# Altium PCB AX301_AX4010.PcbDoc (part 5 of 10)
Units mil, origin at the board's own origin, x right, y up, seen from the top; angles counter-clockwise.
Board outline 5185 x 3614 mil, 4 copper layers (Top Layer, GND, Mid-Layer 1, Bottom Layer); 191 components, 338 nets, 1108 pads, 420 vias.
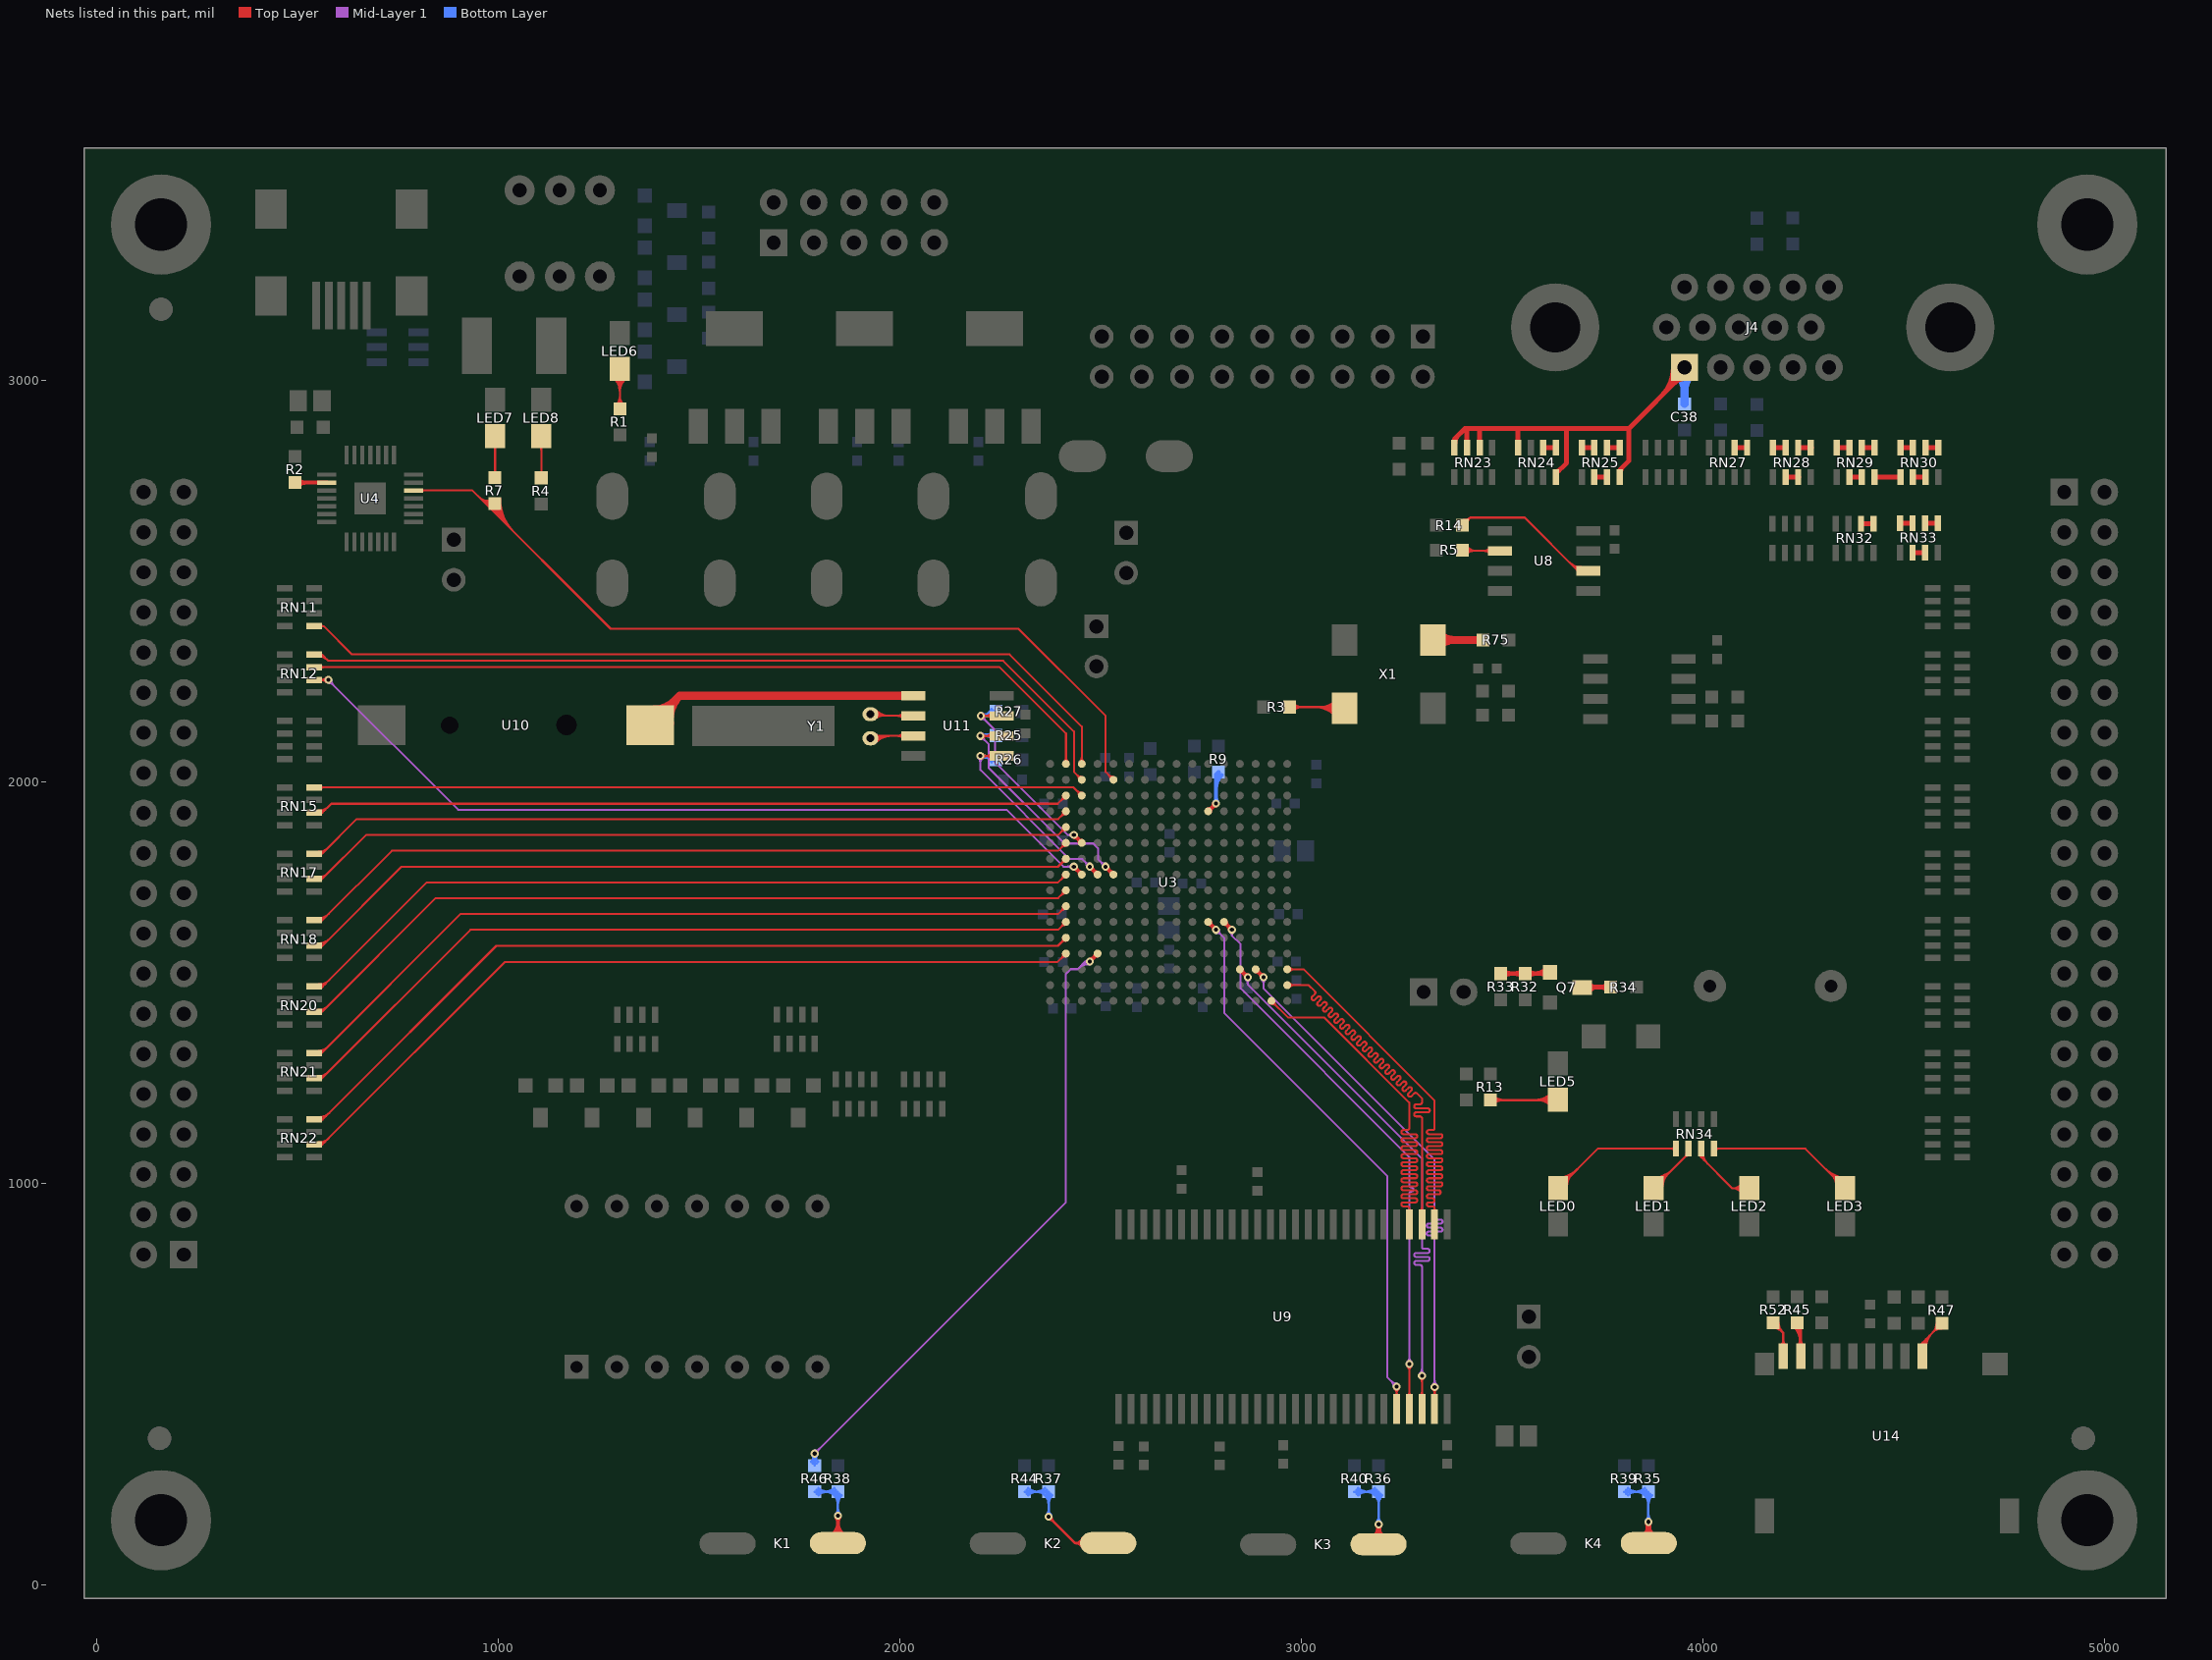
[diagram p7: the nets of this part, all layers, seen from the top]

## Via types
v1: diameter 20, hole 10, Top Layer to Bottom Layer, 377 vias
v2: diameter 30, hole 15, Top Layer to Bottom Layer, 41 vias
v3: diameter 40, hole 20, Top Layer to Bottom Layer, 2 vias

## Nets (pads, with @x,y where several pads share a name; then routed paths per layer and width w, separated by ;. In a path a pad name is that pad's centre, name@x,y a point inside that pad or via, vN(x,y) a via of type N, cw(c..) or ccw(c..) an arc to the next point about the centre after c; other vN are vias at no path point) (continued)
NetK1_1: K1.1 R38.2 R46.2 | length 730.9
  Top Layer w6: K1.1@1828.63,120.37 ccw(c1786.71,162.29) 1846,162.29 ccw(c1905.29,162.29) K1.1@1863.37,120.37 ; K1.1@1832.88,116.12 ccw(c1801.19,147.81) 1846,147.81 ccw(c1890.81,147.81) K1.1@1859.12,116.12 ; K1.1@1837.12,111.88 ccw(c1815.68,133.32) 1846,133.32 ccw(c1876.32,133.32) K1.1@1854.88,111.88 ; v1@1840.31,166.92 cw(c1822.65,154.26) 1844.09,150.72 ; v1@1841.05,166.05 cw(c1829.1,154.1) 1846,154.1 cw(c1862.9,154.1) v1@1850.95,166.05 ; v1@1841.92,165.31 cw(c1834.89,155.51) 1846.79,157.47 ; 1845.21,157.47 cw(c1857.11,155.51) v1@1850.08,165.31 ; K1.1@1846,103 v1(1846,171) ; 1847.91,150.72 cw(c1869.35,154.26) v1@1851.69,166.92
  Bottom Layer w6: R46.2@1788,231 R38.2@1846,231 v1(1846,171) ; R46.2@1792.95,226.05 cw(c1804.9,214.1) 1804.9,231 cw(c1804.9,247.9) R46.2@1792.95,235.95 ; R46.2@1797.19,221.81 cw(c1819.38,199.62) 1819.38,231 cw(c1819.38,262.38) R46.2@1797.19,240.19 ; R38.2@1836.81,240.19 cw(c1814.62,262.38) 1814.62,231 cw(c1814.62,199.62) 1836.81,221.81 cw(c1814.62,199.62) 1846,199.62 cw(c1877.38,199.62) R38.2@1855.19,221.81 ; v1@1841.05,175.95 ccw(c1829.1,187.9) 1846,187.9 ccw(c1862.9,187.9) v1@1850.95,175.95 ; R38.2@1841.05,235.95 cw(c1829.1,247.9) 1829.1,231 cw(c1829.1,214.1) 1841.05,226.05 cw(c1829.1,214.1) 1846,214.1 cw(c1862.9,214.1) R38.2@1850.95,226.05
NetK2_1: K2.1 R37.2 R44.2 | length 656.3
  Top Layer w6: v1@2371,162 cw(c2371,145.1) 2382.95,157.05 cw(c2394.9,169) v1@2378,169 ; v1(2371,169) 2437,103 ; K2.1@2454.96,91.94 ccw(c2437,82.88) 2437,103 ; K2.1@2454.96,114.06 cw(c2437,123.12) 2437,103 ; K2.1@2460.32,94.64 ccw(c2446.75,87.8) 2446.75,103 ccw(c2446.75,118.2) K2.1@2460.32,111.36 ; K2.1@2519.33,103 2437,103
  Bottom Layer w6: R44.2@2311,231 R37.2@2371,231 v1(2371,169) ; R44.2@2315.95,226.05 cw(c2327.9,214.1) 2327.9,231 cw(c2327.9,247.9) R44.2@2315.95,235.95 ; R44.2@2320.19,221.81 cw(c2342.38,199.62) 2342.38,231 cw(c2342.38,262.38) R44.2@2320.19,240.19 ; R37.2@2361.81,240.19 cw(c2339.62,262.38) 2339.62,231 cw(c2339.62,199.62) 2361.81,221.81 cw(c2339.62,199.62) 2371,199.62 cw(c2402.38,199.62) R37.2@2380.19,221.81 ; v1@2366.05,173.95 ccw(c2354.1,185.9) 2371,185.9 ccw(c2387.9,185.9) v1@2375.95,173.95 ; R37.2@2366.05,235.95 cw(c2354.1,247.9) 2354.1,231 cw(c2354.1,214.1) 2366.05,226.05 cw(c2354.1,214.1) 2371,214.1 cw(c2387.9,214.1) R37.2@2375.95,226.05
NetK3_2: K3.2 R36.2 R40.2 | length 648
  Top Layer w6: K3.2@3177.93,119.85 ccw(c3155.31,150) v1(3193,150) ; K3.2@3181.53,115.05 ccw(c3164.32,138) 3193,138 ; v1@3186.94,146.5 cw(c3172.3,138.05) 3188.63,133.67 cw(c3204.95,129.3) v1@3196.5,143.94 ; v1@3188.05,145.05 cw(c3176.1,133.1) 3193,133.1 cw(c3209.9,133.1) v1@3197.95,145.05 ; v1@3189.5,143.94 cw(c3181.05,129.3) 3197.37,133.68 cw(c3213.7,138.05) v1@3199.06,146.5 ; K3.2@3193,100.54 v1(3193,150) ; 3193,137.67 ccw(c3222.05,137.67) K3.2@3204.12,114.81 ; K3.2@3207.82,119.53 cw(c3231.73,150) v1(3193,150)
  Bottom Layer w6: R40.2@3132.33,230.33 R40.2@3133,231 R36.2@3193,231 v1(3193,150) ; R40.2@3137.95,226.05 cw(c3149.9,214.1) 3149.9,231 cw(c3149.9,247.9) R40.2@3137.95,235.95 ; R40.2@3142.19,221.81 cw(c3164.38,199.62) 3164.38,231 cw(c3164.38,262.38) R40.2@3142.19,240.19 ; R36.2@3183.81,240.19 cw(c3161.62,262.38) 3161.62,231 cw(c3161.62,199.62) 3183.81,221.81 cw(c3161.62,199.62) 3193,199.62 cw(c3224.38,199.62) R36.2@3202.19,221.81 ; v1@3188.05,154.95 ccw(c3176.1,166.9) 3193,166.9 ccw(c3209.9,166.9) v1@3197.95,154.95 ; R36.2@3188.05,235.95 cw(c3176.1,247.9) 3176.1,231 cw(c3176.1,214.1) 3188.05,226.05 cw(c3176.1,214.1) 3193,214.1 cw(c3209.9,214.1) R36.2@3197.95,226.05
NetK4_1: K4.1 R35.2 R39.2 | length 678.6
  Top Layer w6: K4.1@3849.55,121.23 ccw(c3818.17,156) v1(3865,156) ; K4.1@3853.57,116.78 ccw(c3830.35,142.5) 3865,142.5 ; v1@3858.94,152.5 cw(c3844.3,144.05) 3860.63,139.67 ; v1@3860.05,151.05 cw(c3848.1,139.1) 3865,139.1 cw(c3881.9,139.1) v1@3869.95,151.05 ; 3860.63,139.68 cw(c3876.95,135.3) v1@3868.5,149.94 ; v1@3861.5,149.94 cw(c3853.05,135.3) 3869.37,139.68 cw(c3885.7,144.05) v1@3871.06,152.5 ; K4.1@3865,104 v1(3865,156) ; 3865,131.11 ccw(c3888.37,131.11) K4.1@3873.82,112.83 ; 3865,143.56 ccw(c3898.27,143.56) K4.1@3877.55,117.52 ; K4.1@3881.29,122.22 cw(c3908.17,156) v1(3865,156)
  Bottom Layer w6: R39.2@3805,231 R35.2@3865,231 v1(3865,156) ; R39.2@3809.95,226.05 cw(c3821.9,214.1) 3821.9,231 cw(c3821.9,247.9) R39.2@3809.95,235.95 ; R39.2@3814.19,221.81 cw(c3836.38,199.62) 3836.38,231 cw(c3836.38,262.38) R39.2@3814.19,240.19 ; R35.2@3855.81,240.19 cw(c3833.62,262.38) 3833.62,231 cw(c3833.62,199.62) 3855.81,221.81 cw(c3833.62,199.62) 3865,199.62 cw(c3896.38,199.62) R35.2@3874.19,221.81 ; v1@3860.05,160.95 ccw(c3848.1,172.9) 3865,172.9 ccw(c3881.9,172.9) v1@3869.95,160.95 ; R35.2@3860.05,235.95 cw(c3848.1,247.9) 3848.1,231 cw(c3848.1,214.1) 3860.05,226.05 cw(c3848.1,214.1) 3865,214.1 cw(c3881.9,214.1) R35.2@3869.95,226.05
NetLED0_1: LED0.1 RN34.5 | length 578.7
  Top Layer w5: LED0.1@3640,987 3738.85,1085.85 RN34.5@3933.51,1085.85 RN34.5@3933.51,1070.51 ; LED0.1@3640,999.5 ccw(c3640,1029.68) LED0.1@3661.34,1008.34 ; LED0.1@3640,1004.5 ccw(c3640,1046.75) 3669.87,1016.87 ; LED0.1@3640,1009.5 ccw(c3640,1063.82) 3678.41,1025.41 ; LED0.1@3640,1014.5 ccw(c3640,1080.89) 3686.95,1033.95 ; LED0.1@3657.5,992 cw(c3687.68,992) 3666.34,1013.34 ; LED0.1@3662.5,992 cw(c3704.75,992) 3674.87,1021.87 ; RN34.5@3929.71,1082.05 ccw(c3920.54,1072.88) 3920.54,1085.85 ccw(c3920.54,1098.82) RN34.5@3929.71,1089.65
NetLED1_1: LED1.1 RN34.6 | length 363.7
  Top Layer w5: LED1.1@3878.33,987 3965.01,1073.67 RN34.6@3965.01,1085.85 ; LED1.1@3878.33,999.5 ccw(c3878.33,1029.68) LED1.1@3899.67,1008.34 ; LED1.1@3878.33,1004.5 ccw(c3878.33,1046.75) 3908.21,1016.87 ; LED1.1@3878.33,1009.5 ccw(c3878.33,1063.82) 3916.74,1025.41 ; LED1.1@3878.33,1014.5 ccw(c3878.33,1080.89) 3925.28,1033.95 ; LED1.1@3895.83,992 cw(c3926.01,992) 3904.67,1013.34 ; LED1.1@3900.83,992 cw(c3943.08,992) 3913.21,1021.87 ; 3955.58,1064.24 ccw(c3945.78,1074.04) RN34.6@3959.63,1074.04 ; 3956.46,1065.12 cw(c3965.01,1056.57) RN34.6@3965.01,1068.66
NetLED2_1: LED2.1 RN34.7 | length 355.3
  Top Layer w5: RN34.7@3991.88,1074.04 ccw(c4003.75,1074.04) 3995.35,1065.65 ; RN34.7@3993.72,1069.44 cw(c3990.72,1064.5) 3996.5,1064.5 ; RN34.7@3996.5,1085.85 3996.5,1064.5 ; RN34.7@3996.88,1074.04 ccw(c4020.82,1074.04) 4003.89,1057.11 ; RN34.7@3999.29,1069.44 ccw(c4002.29,1064.5) 3996.5,1064.5 ; RN34.7@4001.88,1074.04 ccw(c4037.89,1074.04) 4012.43,1048.57 ; LED2.1@4098.1,974.29 ccw(c4074,957.8) 4074,987 ; LED2.1@4098.1,999.71 cw(c4074,1016.2) 4074,987 ; LED2.1@4102.23,977.12 ccw(c4083.48,964.29) 4083.48,987 ccw(c4083.48,1009.71) LED2.1@4102.23,996.88 ; LED2.1@4129.33,987 LED2.1@4116.67,987 4074,987 ; 3996.5,1064.5 4074,987
NetLED3_1: LED3.1 RN34.8 | length 606.7
  Top Layer w5: RN34.8@4028,1076 RN34.8@4028,1085.85 4256.15,1085.85 LED3.1@4355,987 ; RN34.8@4031.8,1082.05 cw(c4040.97,1072.88) 4040.97,1085.85 cw(c4040.97,1098.82) RN34.8@4031.8,1089.65 ; 4308.05,1033.95 ccw(c4355,1080.89) LED3.1@4355,1014.5 ; 4316.59,1025.41 ccw(c4355,1063.82) LED3.1@4355,1009.5 ; 4320.13,1021.87 cw(c4290.25,992) LED3.1@4332.5,992 ; 4325.13,1016.87 ccw(c4355,1046.75) LED3.1@4355,1004.5 ; 4328.66,1013.34 cw(c4307.32,992) LED3.1@4337.5,992 ; LED3.1@4333.66,1008.34 ccw(c4355,1029.68) LED3.1@4355,999.5
NetLED5_2: LED5.2 R13.2 | length 408.6
  Top Layer w6: R13.2@3471,1207 LED5.2@3638,1207 ; R13.2@3475.95,1202.05 cw(c3487.9,1190.1) 3487.9,1207 cw(c3487.9,1223.9) R13.2@3475.95,1211.95 ; R13.2@3480.19,1197.81 cw(c3502.38,1175.62) 3502.38,1207 cw(c3502.38,1238.38) R13.2@3480.19,1216.19 ; 3583.47,1207 ccw(c3583.47,1263.53) LED5.2@3623.44,1223.56 ; 3588.3,1207 cw(c3588.3,1157.3) LED5.2@3623.44,1192.44 ; 3597.96,1207 ccw(c3597.96,1249.04) LED5.2@3627.69,1219.31 ; 3602.79,1207 cw(c3602.79,1171.79) LED5.2@3627.69,1196.69 ; 3612.44,1207 ccw(c3612.44,1234.56) LED5.2@3631.93,1215.07
NetLED6_1: LED6.1 R1.2 | length 381.5
  Top Layer w5: LED6.1@1287.09,3007.09 cw(c1248.68,2968.68) 1303,2968.68 cw(c1357.32,2968.68) LED6.1@1318.91,3007.09 ; LED6.1@1290.63,3010.63 cw(c1260.75,2980.75) 1303,2980.75 cw(c1345.25,2980.75) LED6.1@1315.37,3010.63 ; R1.2@1293.45,2938.55 ccw(c1270.41,2961.59) 1303,2961.59 ccw(c1335.59,2961.59) R1.2@1312.55,2938.55 ; LED6.1@1294.16,3014.16 cw(c1272.82,2992.82) 1303,2992.82 cw(c1333.18,2992.82) LED6.1@1311.84,3014.16 ; R1.2@1296.99,2935.01 ccw(c1282.48,2949.52) 1303,2949.52 ccw(c1323.52,2949.52) R1.2@1309.01,2935.01 ; R1.2@1303,2929 LED6.1@1303,3028
NetLED7_2: LED7.2 R7.2 | length 325.1
  Top Layer w5: LED7.2@976.09,2863.09 cw(c937.68,2824.68) 992,2824.68 cw(c1046.32,2824.68) LED7.2@1007.91,2863.09 ; LED7.2@979.63,2866.63 cw(c949.75,2836.75) 992,2836.75 cw(c1034.25,2836.75) LED7.2@1004.37,2866.63 ; LED7.2@983.16,2870.16 cw(c961.82,2848.82) 992,2848.82 cw(c1022.18,2848.82) LED7.2@1000.84,2870.16 ; R7.2@992,2758 LED7.2@992,2884
NetLED8_2: LED8.2 R4.2 | length 323.1
  Top Layer w5: LED8.2@1091.09,2860.09 cw(c1052.68,2821.68) 1107,2821.68 cw(c1161.32,2821.68) LED8.2@1122.91,2860.09 ; LED8.2@1094.63,2863.63 cw(c1064.75,2833.75) 1107,2833.75 cw(c1149.25,2833.75) LED8.2@1119.37,2863.63 ; LED8.2@1098.16,2867.16 cw(c1076.82,2845.82) 1107,2845.82 cw(c1137.18,2845.82) LED8.2@1115.84,2867.16 ; R4.2@1107,2757 LED8.2@1107,2881
NetQ7_1: Q7.1 R32.2 R33.2 | length 279.3
  Top Layer w12: R33.2@3497,1522 R32.2@3558,1522 Q7.1@3617,1522 ; R33.2@3504.07,1514.93 cw(c3521.14,1497.86) 3521.14,1522 cw(c3521.14,1546.14) R33.2@3504.07,1529.07 ; R32.2@3550.93,1514.93 ccw(c3533.86,1497.86) 3533.86,1522 ccw(c3533.86,1546.14) R32.2@3550.93,1529.07 ; R32.2@3565.07,1514.93 cw(c3582.14,1497.86) 3582.14,1522 cw(c3582.14,1546.14) R32.2@3565.07,1529.07 ; 3583.79,1522 ccw(c3583.79,1561.21) Q7.1@3611.51,1533.49 ; 3598.27,1522 cw(c3598.27,1503.27) Q7.1@3611.51,1516.51
NetQ7_3: Q7.3 R34.1 | length 153.4
  Top Layer w12: Q7.3@3701,1488 R34.1@3771,1488 ; Q7.3@3715.49,1478.51 cw(c3738.38,1455.62) 3738.38,1488 ; Q7.3@3715.49,1495.49 ccw(c3733.56,1513.56) 3733.56,1488 ; R34.1@3763.93,1480.93 ccw(c3746.86,1463.86) 3746.86,1488 ccw(c3746.86,1512.14) R34.1@3763.93,1495.07
NetR2_1: R2.1 U4.9 | length 120.3
  Top Layer w10: R2.1@494.1,2745.1 U4.9@572.68,2745.1 ; R2.1@501.78,2737.22 cw(c520.8,2718.2) 520.8,2745.1 ; R2.1@501.78,2752.78 ccw(c520.31,2771.31) 520.31,2745.1
NetR3_2: R3.2 X1.3 | length 525
  Top Layer w5: R3.2@2971,2186 X1.3@3100,2186 ; R3.2@2977.01,2179.99 cw(c2991.52,2165.48) 2991.52,2186 cw(c2991.52,2206.52) R3.2@2977.01,2192.01 ; R3.2@2980.55,2176.45 cw(c3003.59,2153.41) 3003.59,2186 cw(c3003.59,2218.59) R3.2@2980.55,2195.55 ; 3030.75,2186 cw(c3030.75,2105.75) X1.3@3087.5,2162.5 ; 3042.83,2186 cw(c3042.83,2117.83) X1.3@3091.03,2166.03 ; 3045.24,2186 ccw(c3045.24,2245.76) X1.3@3087.5,2203.5 ; 3054.9,2186 cw(c3054.9,2129.9) X1.3@3094.57,2169.57 ; 3057.31,2186 ccw(c3057.31,2233.69) X1.3@3091.03,2199.97 ; 3066.97,2186 cw(c3066.97,2141.97) X1.3@3098.1,2173.1 ; 3069.38,2186 ccw(c3069.38,2221.62) X1.3@3094.57,2196.43 ; X1.3@3103,2183 X1.3@3108,2183
NetR5_2: R5.2 U8.2 | length 199.7
  Top Layer w5: R5.2@3404,2575 U8.2@3495,2575 ; R5.2@3408.01,2583.01 ccw(c3427.35,2602.35) 3427.35,2575 ; R5.2@3411.55,2567.45 cw(c3429.76,2549.24) 3429.76,2575 ; R5.2@3411.55,2586.55 ccw(c3439.42,2614.42) 3439.42,2575 ; U8.2@3470.28,2568.28 ccw(c3454.06,2552.07) 3454.06,2575 ccw(c3454.06,2597.93) U8.2@3470.28,2581.72
NetR14_2: R14.2 U8.6 | length 494.5
  Top Layer w5: R14.2@3402,2639 3421,2658 ; R14.2@3403.23,2647.41 ccw(c3405.06,2659.86) 3413.96,2650.96 ccw(c3422.86,2642.06) R14.2@3410.41,2640.23 ; R14.2@3403.96,2652.36 ccw(c3406.87,2672.13) 3421,2658 ; R14.2@3415.36,2640.96 cw(c3435.13,2643.87) 3421,2658 ; 3668.83,2546.17 ccw(c3697,2574.33) U8.6@3697,2534.5 ; 3677.37,2537.63 ccw(c3697,2557.26) U8.6@3697,2529.5 ; U8.6@3685.73,2529.27 cw(c3681.46,2525) U8.6@3687.5,2525 ; U8.6@3715,2525 3690,2525 3557,2658 3421,2658
NetR45_2: R45.2 U14.8 | length 259.4
  Top Layer w6: R45.2@4226.81,642.81 cw(c4184.26,600.26) U14.8@4244.43,600.26 ; R45.2@4231.05,647.05 cw(c4198.74,614.74) 4244.43,614.74 ; R45.2@4235.29,651.29 cw(c4213.23,629.23) 4244.43,629.23 ; R45.2@4236,652 4244.43,643.57 U14.8@4244.43,568.82 ; U14.8@4237.58,594.04 ccw(c4219.13,608.94) 4242.58,612.5 ; U14.8@4238.2,594.73 ccw(c4223.16,609.78) 4244.43,609.78 ccw(c4265.7,609.78) U14.8@4250.66,594.73 ; 4243.62,605.59 ccw(c4258.7,607.88) U14.8@4249.66,595.6
NetR47_2: R47.2 U14.1 | length 320.2
  Top Layer w5: U14.1@4541.89,588.5 cw(c4562.15,588.5) 4547.83,602.83 ; U14.1@4543.94,597.07 ccw(c4541.59,602.58) 4547.58,602.58 ; U14.1@4546.89,588.5 cw(c4579.22,588.5) 4556.36,611.36 ; U14.1@4547.58,568.82 4547.58,602.58 ; U14.1@4551.23,597.07 cw(c4553.57,602.58) 4547.58,602.58 ; U14.1@4551.89,588.5 cw(c4596.29,588.5) 4564.9,619.9 ; U14.1@4556.89,588.5 cw(c4613.36,588.5) 4573.43,628.43 ; R47.2@4582.5,651 cw(c4549.91,651) 4572.95,627.95 cw(c4596,604.91) R47.2@4596,637.5 ; R47.2@4587.5,651 cw(c4566.98,651) 4581.49,636.49 cw(c4596,621.98) R47.2@4596,642.5 ; R47.2@4596,651 4547.58,602.58
NetR52_2: R52.2 U14.9 | length 202.8
  Top Layer w6: R52.2@4176,639 cw(c4176,607.62) 4198.19,629.81 cw(c4220.38,652) R52.2@4189,652 ; R52.2@4176,645 cw(c4176,628.1) 4187.95,640.05 cw(c4199.9,652) R52.2@4183,652 ; R52.2@4176,652 4201.13,626.87 U14.9@4201.13,568.82 ; U14.9@4194.9,594.73 ccw(c4179.85,609.78) 4201.13,609.78 ccw(c4222.4,609.78) U14.9@4207.36,594.73
NetR75_1: R75.1 X1.1 | length 191.5
  Top Layer w20: X1.1@3328,2353 R75.1@3438,2353 ; X1.1@3343.2,2337.8 cw(c3379.9,2301.1) 3379.9,2353 cw(c3379.9,2404.9) X1.1@3343.2,2368.2
NetRN24_1: RN24.1 RN24.2 | length 31.5
  Top Layer w12: RN24.2@3603.22,2832 RN24.1@3634.71,2832
NetRN25_1: RN25.1 RN25.2 | length 31.5
  Top Layer w12: RN25.2@3761.93,2832 RN25.1@3793.43,2832
NetRN25_3: RN25.3 RN25.4 | length 31.5
  Top Layer w12: RN25.4@3698.94,2832 RN25.3@3730.44,2832
NetRN25_6: RN25.6 RN25.7 | length 31.5
  Top Layer w12: RN25.6@3730.44,2758.85 RN25.7@3761.93,2758.85
NetRN27_1: RN27.1 RN27.2 | length 31.5
  Top Layer w12: RN27.2@4079.36,2832 RN27.1@4110.86,2832
NetRN28_1: RN28.1 RN28.2 | length 31.5
  Top Layer w12: RN28.2@4239.5,2832 RN28.1@4271,2832
NetRN28_3: RN28.3 RN28.4 | length 31.5
  Top Layer w12: RN28.4@4176.51,2832 RN28.3@4208.01,2832
NetRN28_6: RN28.6 RN28.7 | length 31.5
  Top Layer w12: RN28.6@4208.01,2758.85 RN28.7@4239.5,2758.85
NetRN29_1: RN29.1 RN29.2 | length 31.5
  Top Layer w12: RN29.2@4396.5,2832 RN29.1@4428,2832
NetRN29_3: RN29.3 RN29.4 | length 31.5
  Top Layer w12: RN29.4@4333.51,2832 RN29.3@4365.01,2832
NetRN29_6: RN29.6 RN29.7 | length 31.5
  Top Layer w12: RN29.6@4365.01,2758.85 RN29.7@4396.5,2758.85
NetRN29_8: RN29.8 RN30.5 | length 64.5
  Top Layer w12: RN29.8@4428,2758.85 RN30.5@4492.51,2758.85
NetRN30_1: RN30.1 RN30.2 | length 31.5
  Top Layer w12: RN30.2@4555.5,2832 RN30.1@4587,2832
NetRN30_3: RN30.3 RN30.4 | length 31.5
  Top Layer w12: RN30.4@4492.51,2832 RN30.3@4524.01,2832
NetRN30_6: RN30.6 RN30.7 | length 31.5
  Top Layer w12: RN30.6@4524.01,2758.85 RN30.7@4555.5,2758.85
NetRN32_1: RN32.1 RN32.2 | length 31.5
  Top Layer w12: RN32.2@4394.5,2643 RN32.1@4426,2643
NetRN33_1: RN33.1 RN33.2 | length 31.5
  Top Layer w12: RN33.2@4554.5,2644 RN33.1@4586,2644
NetRN33_3: RN33.3 RN33.4 | length 31.5
  Top Layer w12: RN33.4@4491.51,2644 RN33.3@4523.01,2644
NetRN33_6: RN33.6 RN33.7 | length 31.5
  Top Layer w12: RN33.6@4523.01,2570.85 RN33.7@4554.5,2570.85
NetU10_1: U10.1 U11.1 | length 862
  Top Layer w20: U10.1@1378.63,2141 1451.63,2214 ; U10.1@1388.47,2180.21 ccw(c1388.47,2251.12) 1438.61,2200.98 ; U10.1@1407.57,2143.09 cw(c1458.04,2148.61) U10.1@1422.14,2184.51 ; U10.1@1427.45,2145.26 cw(c1511.2,2154.43) 1451.63,2214 ; U11.1@2034,2214 1451.63,2214
NetU11_2: U11.2 Y1.1 | length 245.8
  Top Layer w5: Y1.1@1931,2164 U11.2@2034,2164 ; Y1.1@1933.04,2171.54 ccw(c1951.23,2189.73) 1951.23,2164 ; Y1.1@1936.57,2175.07 ccw(c1963.3,2201.8) 1963.3,2164 ; Y1.1@1940.11,2157.39 cw(c1956.06,2141.44) 1956.06,2164 ; Y1.1@1940.11,2178.61 ccw(c1975.37,2213.87) 1975.37,2164 ; U11.2@2009.28,2157.28 ccw(c1993.07,2141.07) 1993.07,2164 ccw(c1993.07,2186.93) U11.2@2009.28,2170.72
NetU11_3: U11.3 Y1.2 | length 254.5
  Top Layer w5: Y1.2@1933,2114 U11.3@2034,2114 ; Y1.2@1933.04,2104.46 cw(c1956.06,2081.44) 1956.06,2114 ; Y1.2@1936.57,2100.93 cw(c1968.13,2069.37) 1968.13,2114 ; Y1.2@1940.11,2097.39 cw(c1980.2,2057.3) 1980.2,2114 ; Y1.2@1940.11,2118.61 ccw(c1951.23,2129.73) 1951.23,2114 ; U11.3@2009.28,2107.28 ccw(c1993.07,2091.07) 1993.07,2114 ccw(c1993.07,2136.93) U11.3@2009.28,2120.72
NSTATUS: R9.2 U3.F4 | length 219
  Top Layer w10: U3.F4@2768.43,1926.17 v1(2788.11,1945.85) ; U3.F4@2768.43,1931.01 ccw(c2768.43,1942.7) 2776.69,1934.43 ccw(c2784.96,1926.17) U3.F4@2773.27,1926.17 ; v1@2783.11,1945.85 cw(c2771.04,1945.85) 2779.58,1937.32 cw(c2788.11,1928.78) v1@2788.11,1940.85
  Bottom Layer w10: v1@2784.58,1949.39 ccw(c2776.04,1957.92) 2788.11,1957.92 ccw(c2800.18,1957.92) v1@2791.65,1949.39 ; v1(2788.11,1945.85) 2788.11,2018.11 R9.2@2794,2024 ; 2788.11,1983.23 cw(c2834.77,1983.23) R9.2@2801.78,2016.22 ; 2788.11,2007.37 cw(c2810.63,2007.37) R9.2@2794.71,2023.29
P1: RN11.5 U3.P1 | length 2155.1
  Top Layer w5: RN11.5@541.15,2387.51 565,2387.51 ; RN11.5@556.96,2383.92 cw(c565,2376.71) 565,2387.51 ; RN11.5@556.96,2391.1 ccw(c565,2398.31) 565,2387.51 ; U3.P1@2448.27,2049.47 ccw(c2435.74,2062) 2453.46,2062 ccw(c2471.19,2062) U3.P1@2458.66,2049.47 ; U3.P1@2453.46,2044.28 2453.46,2137.54 2274,2317 635.51,2317 565,2387.51
P2: RN12.8 U3.P2 | length 2177.4
  Top Layer w5: RN12.8@541.15,2316.62 561,2316.62 ; RN12.8@552.96,2311.25 cw(c552.96,2278.87) 575.86,2301.77 ; RN12.8@552.96,2316.25 cw(c552.96,2295.94) 567.32,2310.3 ; RN12.8@557.93,2314.57 cw(c561,2313.3) 561,2316.62 ; RN12.8@557.93,2318.68 ccw(c561,2319.95) 561,2316.62 ; U3.P2@2446.12,2004.91 ccw(c2428.4,2004.91) 2440.93,2017.44 ccw(c2453.46,2029.97) U3.P2@2453.46,2012.25 ; U3.P2@2453.46,2004.91 2434,2024.37 2434,2125 2258,2301 576.62,2301 561,2316.62
P3: RN15.8 U3.P3 | length 1969
  Top Layer w5: RN15.8@541.15,1985.88 2433.12,1985.88 U3.P3@2453.46,1965.54 ; RN15.8@556.76,1982.08 cw(c565.93,1972.9) 565.93,1985.88 cw(c565.93,1998.85) RN15.8@556.76,1989.67 ; U3.P3@2446.12,1965.54 ccw(c2428.4,1965.54) 2440.93,1978.07 ccw(c2453.46,1990.6) U3.P3@2453.46,1972.88
P8: RN12.6 U3.P8 | length 2256.2
  Top Layer w5: RN12.6@541.15,2253.63 v1(576.63,2253.63) ; RN12.6@556.76,2249.83 cw(c565.93,2240.66) 565.93,2253.63 cw(c565.93,2266.61) RN12.6@556.76,2257.43 ; v1@571.33,2248.33 ccw(c558.53,2235.53) 558.53,2253.63 ccw(c558.53,2271.74) v1@571.33,2258.94
  Top Layer w10: v1@2433.78,1783.37 cw(c2433.78,1771.3) 2442.31,1779.84 cw(c2450.85,1788.37) v1@2438.78,1788.37 ; v1(2433.78,1788.37) U3.P8@2453.46,1768.68 ; U3.P8@2448.62,1768.68 ccw(c2436.93,1768.68) 2445.2,1776.95 ccw(c2453.46,1785.22) U3.P8@2453.46,1773.53
  Mid-Layer 1 w5: v1@576.63,2246.13 cw(c576.63,2228.03) 589.44,2240.83 cw(c602.24,2253.63) v1@584.13,2253.63 ; v1(576.63,2253.63) 900.27,1930 2266,1930 2407.63,1788.37 v1(2433.78,1788.37) ; v1@2428.48,1783.07 ccw(c2415.67,1770.26) 2415.67,1788.37 ccw(c2415.67,1806.48) v1@2428.48,1793.67
R1: RN12.7 U3.R1 | length 2065.2
  Top Layer w5: RN12.7@541.15,2285.13 2248.87,2285.13 2414.09,2119.91 U3.R1@2414.09,2044.28 ; RN12.7@556.76,2281.33 cw(c565.93,2272.15) 565.93,2285.13 cw(c565.93,2298.1) RN12.7@556.76,2288.93 ; U3.R1@2408.9,2049.47 ccw(c2396.37,2062) 2414.09,2062 ccw(c2431.82,2062) U3.R1@2419.29,2049.47
R3: RN15.6 U3.R3 | length 1974.2
  Top Layer w5: RN15.6@541.15,1922.88 562,1922.88 ; RN15.6@552.96,1923.26 ccw(c552.96,1945.98) 569.03,1929.91 ; RN15.6@552.96,1928.26 ccw(c552.96,1963.05) 577.57,1938.45 ; RN15.6@557.68,1920.32 cw(c562,1917.97) 562,1922.88 ; RN15.6@557.68,1925.45 ccw(c562,1927.8) 562,1922.88 ; U3.R3@2406.75,1965.54 cw(c2389.03,1965.54) 2401.56,1953 cw(c2414.09,1940.47) U3.R3@2414.09,1958.19 ; U3.R3@2414.09,1965.54 2393.56,1945 584.12,1945 562,1922.88
R4: RN17.8 U3.R4 | length 1993.8
  Top Layer w5: RN17.8@541.15,1820.5 561,1820.5 ; RN17.8@552.96,1820.87 ccw(c552.96,1841.18) 567.32,1826.82 ; RN17.8@552.96,1825.87 ccw(c552.96,1858.26) 575.86,1835.36 ; RN17.8@557.93,1818.45 cw(c561,1817.17) 561,1820.5 ; RN17.8@557.93,1822.55 ccw(c561,1823.83) 561,1820.5 ; U3.R4@2406.75,1926.17 cw(c2389.03,1926.17) 2401.56,1913.63 cw(c2414.09,1901.1) U3.R4@2414.09,1918.82 ; U3.R4@2414.09,1926.17 2394.93,1907 647.5,1907 561,1820.5
R5: RN17.6 U3.R5 | length 2003.6
  Top Layer w5: RN17.6@541.15,1757.51 561,1757.51 ; RN17.6@552.96,1757.88 ccw(c552.96,1778.19) 567.32,1763.83 ; RN17.6@552.96,1762.88 ccw(c552.96,1795.26) 575.86,1772.37 ; RN17.6@557.93,1755.45 cw(c561,1754.18) 561,1757.51 ; RN17.6@557.93,1759.56 ccw(c561,1760.83) 561,1757.51 ; U3.R5@2406.75,1886.8 cw(c2389.03,1886.8) 2401.56,1874.26 cw(c2414.09,1861.73) U3.R5@2414.09,1879.45 ; U3.R5@2414.09,1886.8 2394.3,1867 670.49,1867 561,1757.51
R6: RN18.8 U3.R6 | length 2036.2
  Top Layer w5: RN18.8@541.15,1655.12 562,1655.12 ; RN18.8@552.96,1655.5 ccw(c552.96,1678.22) 569.03,1662.15 ; RN18.8@552.96,1660.5 ccw(c552.96,1695.3) 577.57,1670.69 ; RN18.8@557.68,1652.56 cw(c562,1650.21) 562,1655.12 ; RN18.8@557.68,1657.69 ccw(c562,1660.04) 562,1655.12 ; U3.R6@2406.75,1847.43 cw(c2389.03,1847.43) 2401.56,1834.89 cw(c2414.09,1822.36) U3.R6@2414.09,1840.08 ; U3.R6@2414.09,1847.43 2394.67,1828 734.88,1828 562,1655.12
R7: RN18.6 U3.R7 | length 2062.6
  Top Layer w5: RN18.6@541.15,1592.13 563,1592.13 ; RN18.6@552.96,1587.51 ccw(c552.96,1600.57) 562.2,1591.33 ; RN18.6@552.96,1592.51 ccw(c552.96,1617.65) 570.74,1599.87 ; RN18.6@552.96,1597.51 ccw(c552.96,1634.72) 579.27,1608.41 ; RN18.6@557.43,1589.15 cw(c563,1585.44) 563,1592.13 ; RN18.6@557.43,1595.11 ccw(c563,1598.82) 563,1592.13 ; U3.R7@2406.75,1808.06 cw(c2389.03,1808.06) 2401.56,1795.52 cw(c2414.09,1782.99) U3.R7@2414.09,1800.71 ; U3.R7@2414.09,1808.06 2394.04,1788 758.87,1788 563,1592.13
R8: RN20.8 U3.R8 | length 2088.7
  Top Layer w5: RN20.8@541.15,1489.75 563,1489.75 ; RN20.8@552.96,1485.12 ccw(c552.96,1498.19) 562.2,1488.95 ; RN20.8@552.96,1490.12 ccw(c552.96,1515.26) 570.74,1497.49 ; RN20.8@552.96,1495.12 ccw(c552.96,1532.33) 579.27,1506.02 ; RN20.8@557.43,1486.77 cw(c563,1483.06) 563,1489.75 ; RN20.8@557.43,1492.73 ccw(c563,1496.44) 563,1489.75 ; U3.R8@2406.75,1768.68 cw(c2389.03,1768.68) 2401.56,1756.15 cw(c2414.09,1743.62) U3.R8@2414.09,1761.34 ; U3.R8@2414.09,1768.68 2394.41,1749 822.25,1749 563,1489.75
R9: RN20.6 U3.R9 | length 2075.3
  Top Layer w5: RN20.6@541.15,1426.76 561,1426.76 ; RN20.6@552.96,1427.13 ccw(c552.96,1447.44) 567.32,1433.08 ; RN20.6@552.96,1432.13 ccw(c552.96,1464.51) 575.86,1441.62 ; RN20.6@557.93,1424.7 cw(c561,1423.43) 561,1426.76 ; RN20.6@557.93,1428.81 ccw(c561,1430.08) 561,1426.76 ; U3.R9@2406.75,1729.32 cw(c2389.03,1729.32) 2401.56,1716.78 cw(c2414.09,1704.25) U3.R9@2414.09,1721.97 ; U3.R9@2414.09,1729.32 2394.78,1710 844.24,1710 561,1426.76
R10: RN21.8 U3.R10 | length 2089.8
  Top Layer w5: RN21.8@541.15,1324.38 560,1324.38 905.62,1670 2394.15,1670 U3.R10@2414.09,1689.94 ; RN21.8@552.96,1324.75 ccw(c552.96,1342.65) 565.62,1329.99 ; RN21.8@552.96,1329.75 ccw(c552.96,1359.72) 574.15,1338.53 ; U3.R10@2406.75,1689.94 cw(c2389.03,1689.94) 2401.56,1677.41 cw(c2414.09,1664.88) U3.R10@2414.09,1682.6
R11: RN21.6 U3.R11 | length 2111.2
  Top Layer w5: RN21.6@541.15,1261.38 561,1261.38 ; RN21.6@552.96,1261.76 ccw(c552.96,1282.07) 567.32,1267.71 ; RN21.6@552.96,1266.76 ccw(c552.96,1299.14) 575.86,1276.24 ; RN21.6@557.93,1259.33 cw(c561,1258.06) 561,1261.38 ; RN21.6@557.93,1263.44 ccw(c561,1264.71) 561,1261.38 ; U3.R11@2406.75,1650.57 cw(c2389.03,1650.57) 2401.56,1638.04 cw(c2414.09,1625.51) U3.R11@2414.09,1643.23 ; U3.R11@2414.09,1650.57 2394.52,1631 930.62,1631 561,1261.38
R12: RN22.8 U3.R12 | length 2160.5
  Top Layer w5: RN22.8@541.15,1159 563,1159 ; RN22.8@552.96,1154.37 ccw(c552.96,1167.44) 562.2,1158.2 ; RN22.8@552.96,1159.37 ccw(c552.96,1184.51) 570.74,1166.74 ; RN22.8@552.96,1164.37 ccw(c552.96,1201.58) 579.27,1175.27 ; RN22.8@557.43,1156.02 cw(c563,1152.31) 563,1159 ; RN22.8@557.43,1161.98 ccw(c563,1165.69) 563,1159 ; U3.R12@2406.75,1611.2 cw(c2389.03,1611.2) 2401.56,1598.67 cw(c2414.09,1586.14) U3.R12@2414.09,1603.86 ; U3.R12@2414.09,1611.2 2393.89,1591 995,1591 563,1159
R13: RN22.6 U3.R13 | length 2153.6
  Top Layer w5: RN22.6@541.15,1096.01 562,1096.01 ; RN22.6@552.96,1096.38 ccw(c552.96,1119.11) 569.03,1103.04 ; RN22.6@552.96,1101.38 ccw(c552.96,1136.18) 577.57,1111.57 ; RN22.6@557.68,1093.44 cw(c562,1091.09) 562,1096.01 ; RN22.6@557.68,1098.57 ccw(c562,1100.92) 562,1096.01 ; U3.R13@2406.75,1571.83 cw(c2389.03,1571.83) 2401.56,1559.3 cw(c2414.09,1546.77) U3.R13@2414.09,1564.49 ; U3.R13@2414.09,1571.83 2393.26,1551 1016.99,1551 562,1096.01
RED: C38.1 J4.1 RN23.2 RN23.3 RN23.4 RN24.4 RN24.8 RN25.8 | length 1503.2
  Top Layer w12: RN23.4@3381.51,2832 3381.51,2853.51 3408,2880 3661,2880 ; RN23.4@3383.39,2843.81 cw(c3411.33,2843.81) 3391.57,2863.57 ; RN23.3@3413.01,2832 3413.01,2878.01 ; RN23.2@3444.5,2832 3444.5,2879.5 ; RN24.4@3540.23,2832 3540.23,2879.23 ; RN24.8@3634.71,2758.85 3634.71,2767.71 3661,2794 3661,2880 ; RN24.8@3634.71,2772.54 ccw(c3634.71,2784.17) 3642.94,2775.94 ; RN25.8@3793.43,2758.85 3793.43,2776.43 3816.5,2799.5 3816.5,2880 ; RN25.8@3795.3,2770.66 cw(c3813.75,2770.66) 3800.71,2783.71 ; 3897.66,2961.16 ccw(c3826.81,3032) J4.1@3927,3032 ; 3918.14,2981.64 ccw(c3867.78,3032) J4.1@3939,3032 ; 3930.25,2993.75 cw(c3955,2968.99) J4.1@3955,3004 ; J4.1@3938.63,3002.13 ccw(c3908.75,3032) J4.1@3951,3032 ; J4.1@3955,3032 3955,3018.5 3816.5,2880 ; 3661,2880 3739.5,2880 3816.5,2880
  Bottom Layer w20: J4.1@3938.03,3015.03 cw(c3897.06,2974.06) 3955,2974.06 cw(c4012.94,2974.06) J4.1@3971.97,3015.03 ; C38.1@3955,2941 J4.1@3955,3032
RESET: R46.1 U3.N13 | length 1872.1
  Top Layer w10: v1(2473.15,1552.15) U3.N13@2492.83,1571.83 ; v1@2473.15,1557.15 ccw(c2473.15,1569.22) 2481.68,1560.68 ccw(c2490.22,1552.15) v1@2478.15,1552.15 ; U3.N13@2487.99,1571.83 cw(c2476.3,1571.83) 2484.57,1563.57 cw(c2492.83,1555.3) U3.N13@2492.83,1566.99
  Mid-Layer 1 w5: v1(1788,326) 2413,951 2413,1520 2426,1533 2443,1533 ; v1@1788,333.5 ccw(c1788,351.61) 1800.8,338.8 ccw(c1813.61,326) v1@1795.5,326 ; 2451.07,1541.07 cw(c2471.85,1520.29) v1@2473.05,1549.65 ; 2459.13,1549.13 cw(c2472.48,1535.79) v1@2473.25,1554.65 ; v1@2466.17,1549.41 ccw(c2462.15,1547.83) 2462.15,1552.15 ; v1@2466.17,1554.89 cw(c2462.15,1556.46) 2462.15,1552.15 ; v1@2472.84,1544.65 ccw(c2471.22,1504.79) 2443,1533 ; v1(2473.15,1552.15) 2462.15,1552.15 ; 2443,1533 2462.15,1552.15
  Bottom Layer w6: R46.1@1779.11,305.49 ccw(c1759.89,326) v1(1788,326) ; v1@1782.36,321.85 cw(c1773,314.95) 1784.23,311.94 cw(c1795.47,308.93) v1@1790.81,319.59 ; v1@1783.05,321.05 cw(c1771.1,309.1) 1788,309.1 cw(c1804.9,309.1) v1@1792.95,321.05 ; R46.1@1783.21,301.11 ccw(c1772.86,312.15) 1788,312.15 ccw(c1803.14,312.15) R46.1@1792.79,301.11 ; v1@1785.19,319.59 cw(c1780.53,308.93) 1791.77,311.94 cw(c1803,314.95) v1@1793.64,321.85 ; R46.1@1788,296 v1(1788,326) ; R46.1@1796.89,305.49 cw(c1816.11,326) v1(1788,326)
RTC_DATA: R25.2 U3.M8 U11.6 | length 894.1
  Top Layer w5: v1@2200,2113 v1(2201,2114) U11.6@2254,2114 ; v1@2206.3,2108.7 cw(c2219.11,2095.89) 2219.11,2114 cw(c2219.11,2132.11) v1@2206.3,2119.3 ; U11.6@2229.28,2107.28 ccw(c2213.07,2091.07) 2213.07,2114 ccw(c2213.07,2136.93) U11.6@2229.28,2120.72
  Top Layer w10: v1@2512.52,1783.37 cw(c2512.52,1771.3) 2521.05,1779.84 cw(c2529.59,1788.37) v1@2517.52,1788.37 ; v1(2512.52,1788.37) U3.M8@2532.2,1768.68 ; U3.M8@2527.36,1768.68 ccw(c2515.67,1768.68) 2523.94,1776.95 ccw(c2532.2,1785.22) U3.M8@2532.2,1773.53
  Mid-Layer 1 w5: v1@2201,2106.5 cw(c2201,2088.39) 2213.8,2101.2 cw(c2226.61,2114) v1@2208.5,2114 ; v1(2201,2114) 2221,2094 2221,2035 2410,1846 2482,1846 2494,1834 2494,1806.89 v1(2512.52,1788.37) ; v1@2505.02,1788.37 ccw(c2486.91,1788.37) 2499.72,1801.17 ccw(c2512.52,1813.98) v1@2512.52,1795.87
  Bottom Layer w6: v1(2201,2114) R25.2@2239,2114 ; v1@2204.5,2120.06 ccw(c2215.25,2138.68) 2220.81,2117.91 ; v1@2205.95,2109.05 cw(c2217.9,2097.1) 2217.9,2114 cw(c2217.9,2130.9) v1@2205.95,2118.95 ; v1@2206.2,2114 ccw(c2206.2,2148.8) R25.2@2230.81,2124.19 ; v1@2207.06,2110.5 cw(c2217.72,2104.35) 2214.53,2116.23 ; 2211.03,2114 cw(c2211.03,2086.03) R25.2@2230.81,2105.81 ; 2220.69,2114 ccw(c2220.69,2134.31) R25.2@2235.05,2119.95
RTC_NRST: R26.2 U3.N8 U11.5 | length 822.6
  Top Layer w5: v1(2201,2064) U11.5@2254,2064 ; v1@2206.3,2058.7 cw(c2219.11,2045.89) 2219.11,2064 cw(c2219.11,2082.11) v1@2206.3,2069.3 ; U11.5@2229.28,2057.28 ccw(c2213.07,2041.07) 2213.07,2064 ccw(c2213.07,2086.93) U11.5@2229.28,2070.72
  Top Layer w10: v1@2473.15,1783.37 cw(c2473.15,1771.3) 2481.68,1779.84 cw(c2490.22,1788.37) v1@2478.15,1788.37 ; v1(2473.15,1788.37) U3.N8@2492.83,1768.68 ; U3.N8@2487.99,1768.68 ccw(c2476.3,1768.68) 2484.57,1776.95 ccw(c2492.83,1785.22) U3.N8@2492.83,1773.53
  Mid-Layer 1 w5: v1@2195.7,2058.7 cw(c2182.89,2045.89) 2201,2045.89 cw(c2219.11,2045.89) v1@2206.3,2058.7 ; v1(2201,2064) 2201,2029 2423,1807 2454.52,1807 v1(2473.15,1788.37) ; v1@2465.65,1788.37 ccw(c2447.54,1788.37) 2460.35,1801.17 ccw(c2473.15,1813.98) v1@2473.15,1795.87
  Bottom Layer w6: v1@2204.51,2057.94 cw(c2212.94,2043.41) 2217.28,2059.64 cw(c2221.63,2075.86) v1@2207.07,2067.49 ; v1@2205.95,2059.05 cw(c2217.9,2047.1) 2217.9,2064 cw(c2217.9,2080.9) v1@2205.95,2068.95 ; 2211.64,2064 cw(c2211.64,2037.86) R26.2@2234.01,2051.38 ; 2222.27,2064 cw(c2222.27,2044.29) R26.2@2239.14,2054.48 ; R26.2@2228.87,2048.28 ccw(c2201,2031.43) v1(2201,2064) 2231,2064 R26.2@2240,2055
RTC_SCLK: R27.2 U3.P6 U11.7 | length 811.6
  Top Layer w5: v1(2202,2164) U11.7@2254,2164 ; v1@2207.3,2158.7 cw(c2220.11,2145.89) 2220.11,2164 cw(c2220.11,2182.11) v1@2207.3,2169.3 ; U11.7@2229.28,2157.28 ccw(c2213.07,2141.07) 2213.07,2164 ccw(c2213.07,2186.93) U11.7@2229.28,2170.72
  Top Layer w10: v1@2433.78,1862.11 cw(c2433.78,1850.04) 2442.31,1858.58 cw(c2450.85,1867.11) v1@2438.78,1867.11 ; v1(2433.78,1867.11) U3.P6@2453.46,1847.43 ; U3.P6@2448.62,1847.43 ccw(c2436.93,1847.43) 2445.2,1855.69 ccw(c2453.46,1863.96) U3.P6@2453.46,1852.27
  Mid-Layer 1 w5: v1@2202,2156.5 cw(c2202,2138.39) 2214.8,2151.2 cw(c2227.61,2164) v1@2209.5,2164 ; v1(2202,2164) 2237,2129 2237,2049 2418.89,1867.11 ; v1@2427.75,1862.65 ccw(c2418.89,1856.08) 2418.89,1867.11 ; v1@2427.75,1871.58 cw(c2418.89,1878.14) 2418.89,1867.11 ; v1(2433.78,1867.11) 2418.89,1867.11
  Bottom Layer w6: v1@2206,2169.74 ccw(c2213.26,2180.15) 2216.54,2167.9 ccw(c2219.83,2155.64) v1@2208.34,2161.03 ; v1@2206.63,2169.25 ccw(c2216,2179.87) 2219.67,2166.19 ; v1@2206.95,2159.05 cw(c2218.9,2147.1) 2218.9,2164 cw(c2218.9,2180.9) v1@2206.95,2168.95 ; v1@2208.06,2160.5 cw(c2215.43,2156.25) 2213.23,2164.46 ; v1@2211.5,2164 ccw(c2211.5,2188.56) R27.2@2233.68,2178.01 ; 2221,2164 ccw(c2221,2184.04) R27.2@2239.1,2175.43 ; R27.2@2228.26,2180.59 cw(c2202,2193.08) v1(2202,2164) R27.2@2229,2164
RXD: R7.1 U3.M2 U4.26 | length 2731.8
  Top Layer w5: U4.26@789.21,2725.42 935.58,2725.42 1280,2381 2296,2381 2513,2164 2513,2024.11 U3.M2@2532.2,2004.91 ; U4.26@809.51,2723.43 cw(c814.32,2718.62) 814.32,2725.42 cw(c814.32,2732.21) U4.26@809.51,2727.41 ; 950.45,2710.55 ccw(c975.89,2735.98) R7.1@991.66,2703.65 ; 955.41,2705.59 ccw(c979.14,2729.32) R7.1@993.85,2699.16 ; 960.37,2700.63 ccw(c982.39,2722.66) R7.1@996.04,2694.66 ; 965.32,2695.68 ccw(c985.64,2715.99) R7.1@998.23,2690.17 ; R7.1@979.5,2705 ccw(c1036.23,2705) 996.12,2664.88 ; R7.1@984.5,2705 ccw(c1053.31,2705) 1004.65,2656.35 ; R7.1@989.5,2705 ccw(c1070.38,2705) 1013.19,2647.81 ; R7.1@994.5,2705 ccw(c1087.45,2705) 1021.72,2639.28 ; R7.1@999.5,2705 ccw(c1104.52,2705) 1030.26,2630.74 ; R7.1@1004.5,2705 ccw(c1121.59,2705) 1038.79,2622.21 ; U3.M2@2524.86,2004.91 ccw(c2507.14,2004.91) 2519.67,2017.44 ccw(c2532.2,2029.97) U3.M2@2532.2,2012.25
S_A0: U3.F11 U9.23 | length 1553.4
  Top Layer w5: v1@3232.61,487.61 cw(c3219.81,474.81) 3237.91,474.81 cw(c3256.02,474.81) v1@3243.22,487.61 ; U9.23@3233.67,470.24 ccw(c3223.43,480.49) 3237.91,480.49 ccw(c3252.4,480.49) U9.23@3242.16,470.24 ; U9.23@3237.91,437 v1(3237.91,492.91)
  Top Layer w10: U3.F11@2768.43,1645.73 cw(c2768.43,1634.04) 2776.69,1642.31 cw(c2784.96,1650.57) U3.F11@2773.27,1650.57 ; U3.F11@2768.43,1650.57 v1(2788.11,1630.89) ; v1@2783.11,1630.89 ccw(c2771.04,1630.89) 2779.58,1639.42 ccw(c2788.11,1647.96) v1@2788.11,1635.89
  Mid-Layer 1 w5: v1@2788.11,1623.39 cw(c2788.11,1605.28) 2800.91,1618.09 cw(c2813.72,1630.89) v1@2795.61,1630.89 ; v1(2788.11,1630.89) 2808,1611 2808,1424 3215,1017 3215,515.83 v1(3237.91,492.91) ; v1@3230.41,492.91 ccw(c3212.31,492.91) 3225.11,505.72 ccw(c3237.91,518.52) v1@3237.91,500.41
S_A1: U3.E11 U9.24 | length 1552.4
  Top Layer w5: v1@3264.11,543.7 cw(c3251.3,530.89) 3269.41,530.89 cw(c3287.52,530.89) v1@3274.71,543.7 ; U9.24@3265.17,470.24 ccw(c3254.92,480.49) 3269.41,480.49 ccw(c3283.89,480.49) U9.24@3273.65,470.24 ; U9.24@3269.41,437 v1(3269.41,549)
  Top Layer w10: U3.E11@2807.8,1645.73 cw(c2807.8,1634.04) 2816.06,1642.31 cw(c2824.33,1650.57) U3.E11@2812.64,1650.57 ; U3.E11@2807.8,1650.57 v1(2827.48,1630.89) ; v1@2822.48,1630.89 ccw(c2810.41,1630.89) 2818.95,1639.42 ccw(c2827.48,1647.96) v1@2827.48,1635.89
  Mid-Layer 1 w5: v1@2823.19,1624.74 cw(c2817.47,1616.52) 2827.48,1616.52 ; v1(2827.48,1630.89) 2827.48,1616.52 ; v1@2831.77,1624.74 ccw(c2837.5,1616.52) 2827.48,1616.52 ; v1@3264.11,554.3 ccw(c3251.3,567.11) 3269.41,567.11 ccw(c3287.52,567.11) v1@3274.71,554.3 ; v1(3269.41,549) 3269.41,974 cw(c3274.41,974) 3274.41,979 ccw(c3274.41,984) 3279.41,984 ccw(c3274.41,984) 3274.41,989 cw(c3274.41,994) 3269.41,994 3269.41,1064.59 2849,1485 2849,1595 2827.48,1616.52
S_A2: U3.D14 U9.25 | length 1560.2
  Top Layer w5: v1@3295.6,514.7 cw(c3282.8,501.89) 3300.91,501.89 cw(c3319.01,501.89) v1@3306.21,514.7 ; U9.25@3296.66,470.24 ccw(c3286.42,480.49) 3300.91,480.49 ccw(c3315.39,480.49) U9.25@3305.15,470.24 ; U9.25@3300.91,437 v1(3300.91,520)
  Top Layer w10: U3.D14@2847.17,1527.62 cw(c2847.17,1515.93) 2855.43,1524.2 cw(c2863.7,1532.46) U3.D14@2852.01,1532.46 ; U3.D14@2847.17,1532.46 v1(2866.85,1512.78) ; v1@2861.85,1512.78 ccw(c2849.78,1512.78) 2858.32,1521.31 ccw(c2866.85,1529.85) v1@2866.85,1517.78
  Mid-Layer 1 w5: v1@2861.68,1507.35 cw(c2850.19,1495.28) 2866.85,1495.28 ; v1(2866.85,1512.78) 2866.85,1495.28 ; v1@2872.02,1507.35 ccw(c2883.52,1495.28) 2866.85,1495.28 ; v1@3295.6,525.3 ccw(c3282.8,538.11) 3300.91,538.11 ccw(c3319.01,538.11) v1@3306.21,525.3 ; v1(3300.91,520) 3300.91,791 ccw(c3295.91,791) 3295.91,796 3286.62,796 cw(c3286.62,801) 3281.62,801 cw(c3286.62,801) 3286.62,806 3315.19,806 ccw(c3315.19,811) 3320.19,811 ccw(c3315.19,811) 3315.19,816 3286.62,816 cw(c3286.62,821) 3281.62,821 cw(c3286.62,821) 3286.62,826 3315.19,826 ccw(c3315.19,831) 3320.19,831 ccw(c3315.19,831) 3315.19,836 3305.91,836 cw(c3305.91,841) 3300.91,841 3300.91,1061.22 2866.85,1495.28
S_A3: U3.C14 U9.26 | length 1561.6
  Top Layer w5: v1@3327.1,486.7 cw(c3314.3,473.89) 3332.4,473.89 cw(c3350.51,473.89) v1@3337.7,486.7 ; U9.26@3328.16,470.24 ccw(c3317.92,480.49) 3332.4,480.49 ccw(c3346.89,480.49) U9.26@3336.64,470.24 ; U9.26@3332.4,437 v1(3332.4,492)
  Top Layer w10: U3.C14@2886.54,1527.62 cw(c2886.54,1515.93) 2894.8,1524.2 cw(c2903.07,1532.46) U3.C14@2891.38,1532.46 ; U3.C14@2886.54,1532.46 v1(2906.22,1512.78) ; v1@2901.22,1512.78 ccw(c2889.15,1512.78) 2897.69,1521.31 ccw(c2906.22,1529.85) v1@2906.22,1517.78
  Mid-Layer 1 w5: v1@2900.92,1507.48 cw(c2888.11,1494.67) 2906.22,1494.67 cw(c2924.33,1494.67) v1@2911.52,1507.48 ; v1(2906.22,1512.78) 2906.22,1484.78 3332.4,1058.6 3332.4,914 ccw(c3337.4,914) 3337.4,909 3347.09,909 cw(c3347.09,904) 3352.09,904 cw(c3347.09,904) 3347.09,899 3317.71,899 ccw(c3317.71,894) 3312.71,894 ccw(c3317.71,894) 3317.71,889 3347.09,889 cw(c3347.09,884) 3352.09,884 cw(c3347.09,884) 3347.09,879 3317.71,879 ccw(c3317.71,874) 3312.71,874 ccw(c3317.71,874) 3317.71,869 3327.4,869 cw(c3327.4,864) 3332.4,864 v1(3332.4,492) ; v1@3327.1,497.3 ccw(c3314.3,510.11) 3332.4,510.11 ccw(c3350.51,510.11) v1@3337.7,497.3
S_A4: U3.A14 U9.29 | length 1458.2
  Top Layer w5: U3.A14@2965.28,1532.46 3005.54,1532.46 3332.4,1205.6 3332.4,1137 cw(c3327.4,1137) 3327.4,1132 3317.97,1132 ccw(c3317.97,1127) 3312.97,1127 ccw(c3317.97,1127) 3317.97,1122 3346.84,1122 cw(c3346.84,1117) 3351.84,1117 cw(c3346.84,1117) 3346.84,1112 3317.97,1112 ccw(c3317.97,1107) 3312.97,1107 ccw(c3317.97,1107) 3317.97,1102 3346.84,1102 cw(c3346.84,1097) 3351.84,1097 cw(c3346.84,1097) 3346.84,1092 3317.97,1092 ccw(c3317.97,1087) 3312.97,1087 ccw(c3317.97,1087) 3317.97,1082 3346.84,1082 cw(c3346.84,1077) 3351.84,1077 cw(c3346.84,1077) 3346.84,1072 3317.97,1072 ccw(c3317.97,1067) 3312.97,1067 ccw(c3317.97,1067) 3317.97,1062 3346.84,1062 cw(c3346.84,1057) 3351.84,1057 cw(c3346.84,1057) 3346.84,1052 3317.97,1052 ccw(c3317.97,1047) 3312.97,1047 ccw(c3317.97,1047) 3317.97,1042 3346.84,1042 cw(c3346.84,1037) 3351.84,1037 cw(c3346.84,1037) 3346.84,1032 3317.97,1032 ccw(c3317.97,1027) 3312.97,1027 ccw(c3317.97,1027) 3317.97,1022 3346.84,1022 cw(c3346.84,1017) 3351.84,1017 cw(c3346.84,1017) 3346.84,1012 3317.97,1012 ccw(c3317.97,1007) 3312.97,1007 ccw(c3317.97,1007) 3317.97,1002 3346.84,1002 cw(c3346.84,997) 3351.84,997 cw(c3346.84,997) 3346.84,992 3317.97,992 ccw(c3317.97,987) 3312.97,987 ccw(c3317.97,987) 3317.97,982 3342.46,982 cw(c3342.46,977) 3347.46,977 cw(c3342.46,977) 3342.46,972 3317.97,972 ccw(c3317.97,967) 3312.97,967 ccw(c3317.97,967) 3317.97,962 3327.4,962 cw(c3327.4,957) 3332.4,957 cw(c3327.4,957) 3327.4,952 3317.97,952 ccw(c3317.97,947) 3312.97,947 ccw(c3317.97,947) 3317.97,942 3327.4,942 cw(c3327.4,937) 3332.4,937 ; U3.A14@2970.47,1527.27 cw(c2983,1514.74) 2983,1532.46 cw(c2983,1550.19) U3.A14@2970.47,1537.66 ; U9.29@3329.15,931.04 ccw(c3325.32,937) 3332.4,937 ; U9.29@3332.4,897 3332.4,937 ; U9.29@3335.65,931.04 cw(c3339.48,937) 3332.4,937
S_A5: U3.A15 U9.30 | length 1466.8
  Top Layer w5: U3.A15@2965.28,1493.09 3018.91,1493.09 3034.07,1477.93 cw(c3030.54,1474.39) 3034.07,1470.86 3027.31,1464.1 ccw(c3030.85,1460.57) 3027.31,1457.03 ccw(c3030.85,1460.57) 3034.39,1457.03 3041.14,1463.79 cw(c3044.68,1460.25) 3048.21,1463.79 cw(c3044.68,1460.25) 3048.21,1456.72 3041.46,1449.96 ccw(c3044.99,1446.42) 3041.46,1442.89 ccw(c3044.99,1446.42) 3048.53,1442.89 3055.28,1449.64 cw(c3058.82,1446.11) 3062.36,1449.64 cw(c3058.82,1446.11) 3062.36,1442.57 3055.6,1435.82 ccw(c3059.13,1432.28) 3055.6,1428.75 ccw(c3059.13,1432.28) 3062.67,1428.75 3069.43,1435.5 cw(c3072.96,1431.97) 3076.5,1435.5 cw(c3072.96,1431.97) 3076.5,1428.43 3069.74,1421.67 ccw(c3073.28,1418.14) 3069.74,1414.6 ccw(c3073.28,1418.14) 3076.81,1414.6 3083.57,1421.36 cw(c3087.1,1417.82) 3090.64,1421.36 cw(c3087.1,1417.82) 3090.64,1414.29 3083.88,1407.53 ccw(c3087.42,1404) 3083.88,1400.46 ccw(c3087.42,1404) 3090.95,1400.46 3097.71,1407.22 cw(c3101.25,1403.68) 3104.78,1407.22 cw(c3101.25,1403.68) 3104.78,1400.15 3098.02,1393.39 ccw(c3101.56,1389.85) 3098.02,1386.32 ccw(c3101.56,1389.85) 3105.1,1386.32 3111.85,1393.08 cw(c3115.39,1389.54) 3118.92,1393.08 cw(c3115.39,1389.54) 3118.92,1386.01 3112.17,1379.25 ccw(c3115.7,1375.71) 3112.17,1372.18 ccw(c3115.7,1375.71) 3119.24,1372.18 3125.99,1378.93 cw(c3129.53,1375.4) 3133.07,1378.93 cw(c3129.53,1375.4) 3133.07,1371.86 3126.31,1365.11 ccw(c3129.84,1361.57) 3126.31,1358.03 ccw(c3129.84,1361.57) 3133.38,1358.03 3140.14,1364.79 cw(c3143.67,1361.26) 3147.21,1364.79 cw(c3143.67,1361.26) 3147.21,1357.72 3140.45,1350.96 ccw(c3143.99,1347.43) 3140.45,1343.89 ccw(c3143.99,1347.43) 3147.52,1343.89 3154.28,1350.65 cw(c3157.81,1347.11) 3161.35,1350.65 cw(c3157.81,1347.11) 3161.35,1343.58 3154.59,1336.82 ccw(c3158.13,1333.29) 3154.59,1329.75 ccw(c3158.13,1333.29) 3161.66,1329.75 3168.42,1336.51 cw(c3171.96,1332.97) 3175.49,1336.51 cw(c3171.96,1332.97) 3175.49,1329.44 3168.74,1322.68 ccw(c3172.27,1319.14) 3168.74,1315.61 ccw(c3172.27,1319.14) 3175.81,1315.61 3182.56,1322.37 cw(c3186.1,1318.83) 3189.63,1322.37 cw(c3186.1,1318.83) 3189.63,1315.29 3182.88,1308.54 ccw(c3186.41,1305) 3182.88,1301.47 ccw(c3186.41,1305) 3189.95,1301.47 3196.71,1308.22 cw(c3200.24,1304.69) 3203.78,1308.22 cw(c3200.24,1304.69) 3203.78,1301.15 3197.02,1294.4 ccw(c3200.56,1290.86) 3197.02,1287.32 ccw(c3200.56,1290.86) 3204.09,1287.32 3210.85,1294.08 cw(c3214.38,1290.55) 3217.92,1294.08 cw(c3214.38,1290.55) 3217.92,1287.01 3211.16,1280.25 ccw(c3214.7,1276.72) 3211.16,1273.18 ccw(c3214.7,1276.72) 3218.23,1273.18 3224.99,1279.94 cw(c3228.53,1276.4) 3232.06,1279.94 cw(c3228.53,1276.4) 3232.06,1272.87 3225.3,1266.11 ccw(c3228.84,1262.58) 3225.3,1259.04 ccw(c3228.84,1262.58) 3232.38,1259.04 3239.13,1265.8 cw(c3242.67,1262.26) 3246.2,1265.8 cw(c3242.67,1262.26) 3246.2,1258.73 3239.45,1251.97 ccw(c3242.98,1248.43) 3239.45,1244.9 ccw(c3242.98,1248.43) 3246.52,1244.9 3253.27,1251.65 cw(c3256.81,1248.12) 3260.35,1251.65 cw(c3256.81,1248.12) 3260.35,1244.58 3253.59,1237.83 ccw(c3257.12,1234.29) 3253.59,1230.76 ccw(c3257.12,1234.29) 3260.66,1230.76 3267.42,1237.51 cw(c3270.95,1233.98) 3274.49,1237.51 cw(c3270.95,1233.98) 3274.49,1230.44 3267.73,1223.68 ccw(c3271.27,1220.15) 3267.73,1216.61 ccw(c3271.27,1220.15) 3274.8,1216.61 3281.56,1223.37 cw(c3285.09,1219.83) 3288.63,1223.37 3300.91,1211.09 3300.91,1201.09 cw(c3295.91,1201.09) 3295.91,1196.09 3286.35,1196.09 ccw(c3286.35,1191.09) 3281.35,1191.09 ccw(c3286.35,1191.09) 3286.35,1186.09 3315.46,1186.09 cw(c3315.46,1181.09) 3320.46,1181.09 cw(c3315.46,1181.09) 3315.46,1176.09 3286.35,1176.09 ccw(c3286.35,1171.09) 3281.35,1171.09 ccw(c3286.35,1171.09) 3286.35,1166.09 3295.91,1166.09 cw(c3295.91,1161.09) 3300.91,1161.09 U9.30@3300.91,897 ; U3.A15@2970.47,1487.9 cw(c2983,1475.37) 2983,1493.09 cw(c2983,1510.82) U3.A15@2970.47,1498.29 ; U9.30@3296.66,930.24 ccw(c3286.42,940.49) 3300.91,940.49 ccw(c3315.39,940.49) U9.30@3305.15,930.24
S_A6: U3.B16 U9.31 | length 1458.2
  Top Layer w5: U3.B16@2925.91,1446.38 cw(c2925.91,1428.66) 2938.44,1441.19 cw(c2950.97,1453.72) U3.B16@2933.25,1453.72 ; U3.B16@2925.91,1453.72 2967.63,1412 3058,1412 3269.41,1200.59 3269.41,1137 cw(c3264.41,1137) 3264.41,1132 3254.67,1132 ccw(c3254.67,1127) 3249.67,1127 ccw(c3254.67,1127) 3254.67,1122 3284.15,1122 cw(c3284.15,1117) 3289.15,1117 cw(c3284.15,1117) 3284.15,1112 3254.67,1112 ccw(c3254.67,1107) 3249.67,1107 ccw(c3254.67,1107) 3254.67,1102 3284.15,1102 cw(c3284.15,1097) 3289.15,1097 cw(c3284.15,1097) 3284.15,1092 3254.67,1092 ccw(c3254.67,1087) 3249.67,1087 ccw(c3254.67,1087) 3254.67,1082 3284.15,1082 cw(c3284.15,1077) 3289.15,1077 cw(c3284.15,1077) 3284.15,1072 3254.67,1072 ccw(c3254.67,1067) 3249.67,1067 ccw(c3254.67,1067) 3254.67,1062 3284.15,1062 cw(c3284.15,1057) 3289.15,1057 cw(c3284.15,1057) 3284.15,1052 3254.67,1052 ccw(c3254.67,1047) 3249.67,1047 ccw(c3254.67,1047) 3254.67,1042 3284.15,1042 cw(c3284.15,1037) 3289.15,1037 cw(c3284.15,1037) 3284.15,1032 3254.67,1032 ccw(c3254.67,1027) 3249.67,1027 ccw(c3254.67,1027) 3254.67,1022 3284.15,1022 cw(c3284.15,1017) 3289.15,1017 cw(c3284.15,1017) 3284.15,1012 3254.67,1012 ccw(c3254.67,1007) 3249.67,1007 ccw(c3254.67,1007) 3254.67,1002 3284.15,1002 cw(c3284.15,997) 3289.15,997 cw(c3284.15,997) 3284.15,992 3254.67,992 ccw(c3254.67,987) 3249.67,987 ccw(c3254.67,987) 3254.67,982 3284.15,982 cw(c3284.15,977) 3289.15,977 cw(c3284.15,977) 3284.15,972 3254.67,972 ccw(c3254.67,967) 3249.67,967 ccw(c3254.67,967) 3254.67,962 3284.15,962 cw(c3284.15,957) 3289.15,957 cw(c3284.15,957) 3284.15,952 3254.67,952 ccw(c3254.67,947) 3249.67,947 ccw(c3254.67,947) 3254.67,942 3264.41,942 cw(c3264.41,937) 3269.41,937 ; U9.31@3266.16,931.04 ccw(c3262.33,937) 3269.41,937 ; U9.31@3269.41,897 3269.41,937 ; U9.31@3272.66,931.04 cw(c3276.49,937) 3269.41,937